# Altium PCB FPv1.3.2.PcbDoc (part 2 of 9)
Units mm, origin at the board's own origin, x right, y up, seen from the top; angles counter-clockwise.
Board outline 81.28 x 53.34 mm, 4 copper layers (Top Layer, GROUND PLANE, POWER PLANE, Bottom Layer); 98 components, 183 nets, 614 pads, 312 vias.
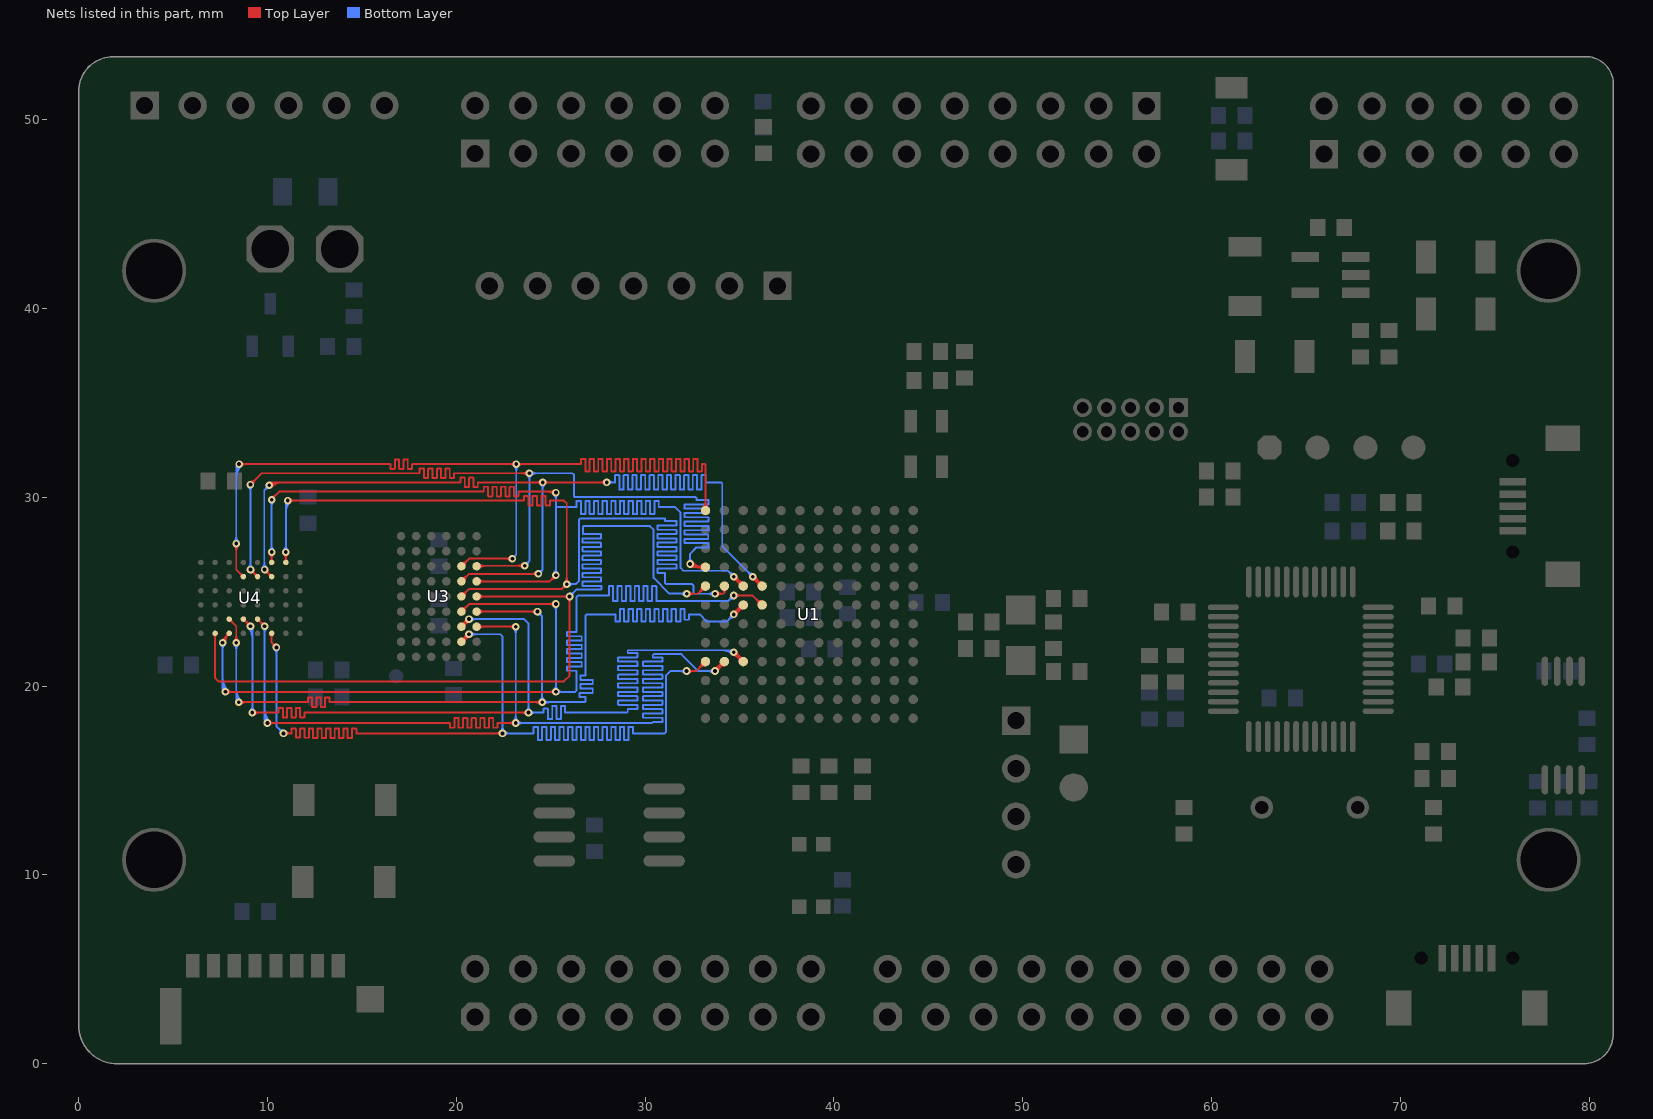
[diagram p4: the nets of this part, all layers, seen from the top]

## Via types
v1: diameter 0.403, hole 0.2, Top Layer to Bottom Layer, tented both sides, 261 vias
v2: diameter 0.503, hole 0.3, Top Layer to Bottom Layer, tented both sides, 25 vias
v3: diameter 0.6, hole 0.4, Top Layer to Bottom Layer, tented both sides, 11 vias
v4: diameter 0.508, hole 0.33, Top Layer to Bottom Layer, tented both sides, 5 vias
v5: diameter 0.703, hole 0.4, Top Layer to Bottom Layer, tented both sides, 3 vias
v6: diameter 0.603, hole 0.4, Top Layer to Bottom Layer, tented both sides, 2 vias
v7: diameter 0.503, hole 0.25, Top Layer to Bottom Layer, tented both sides, 2 vias
v8: diameter 0.6, hole 0.24, Top Layer to Bottom Layer, tented both sides, 1 vias
v9: diameter 0.508, hole 0.349, Top Layer to Bottom Layer, tented both sides, 1 vias
v10: diameter 0.603, hole 0.3, Top Layer to Bottom Layer, tented both sides, 1 vias

## Nets (pads, with @x,y where several pads share a name; then routed paths per layer and width w, separated by ;. In a path a pad name is that pad's centre, name@x,y a point inside that pad or via, vN(x,y) a via of type N, cw(c..) or ccw(c..) an arc to the next point about the centre after c; other vN are vias at no path point) (continued)
AD2: U1.A4 U3.H5 U4.C6 | length 70.7
  Top Layer w0.102: U4.C6@10.158,22.733 cw(c9.998,22.573) 10.225,22.573 cw(c10.452,22.573) U4.C6@10.292,22.733 ; U4.C6@10.225,22.8 10.225,22.3 ; v1@10.324,22.054 ccw(c9.986,22.061) 10.225,22.3 ; v1@10.471,22.201 cw(c10.464,22.539) 10.225,22.3 ; v1(10.475,22.05) 10.225,22.3 ; v1(10.85,17.5) 11.255,17.5 ccw(c11.255,17.523) 11.278,17.523 11.278,17.731 cw(c11.301,17.731) 11.301,17.754 11.484,17.754 cw(c11.484,17.731) 11.507,17.731 11.507,17.31 ccw(c11.53,17.31) 11.53,17.287 11.712,17.287 ccw(c11.712,17.31) 11.735,17.31 11.735,17.731 cw(c11.758,17.731) 11.758,17.754 11.941,17.754 cw(c11.941,17.731) 11.964,17.731 11.964,17.29 ccw(c11.987,17.29) 11.987,17.267 12.17,17.267 ccw(c12.17,17.29) 12.193,17.29 12.193,17.731 cw(c12.215,17.731) 12.215,17.754 12.398,17.754 cw(c12.398,17.731) 12.421,17.731 12.421,17.269 ccw(c12.444,17.269) 12.444,17.246 12.627,17.246 ccw(c12.627,17.269) 12.65,17.269 12.65,17.731 cw(c12.673,17.731) 12.673,17.754 12.855,17.754 cw(c12.855,17.731) 12.878,17.731 12.878,17.269 ccw(c12.901,17.269) 12.901,17.246 13.084,17.246 ccw(c13.084,17.269) 13.107,17.269 13.107,17.731 cw(c13.13,17.731) 13.13,17.754 13.313,17.754 cw(c13.313,17.731) 13.336,17.731 13.336,17.269 ccw(c13.358,17.269) 13.358,17.246 13.541,17.246 ccw(c13.541,17.269) 13.564,17.269 13.564,17.731 cw(c13.587,17.731) 13.587,17.754 13.77,17.754 cw(c13.77,17.731) 13.793,17.731 13.793,17.269 ccw(c13.816,17.269) 13.816,17.246 13.998,17.246 ccw(c13.998,17.269) 14.021,17.269 14.021,17.731 cw(c14.044,17.731) 14.044,17.754 14.227,17.754 cw(c14.227,17.731) 14.25,17.731 14.25,17.269 ccw(c14.273,17.269) 14.273,17.246 14.456,17.246 ccw(c14.456,17.269) 14.479,17.269 14.479,17.731 cw(c14.501,17.731) 14.501,17.754 14.684,17.754 cw(c14.684,17.731) 14.707,17.731 14.707,17.523 ccw(c14.73,17.523) 14.73,17.5 v1(22.45,17.5) ; v1@10.957,17.393 cw(c11.214,17.136) 11.214,17.5 cw(c11.214,17.864) v1@10.957,17.607 ; U3.H5@20.275,22.35 v1(20.675,22.75) ; U3.H5@20.275,22.524 ccw(c20.275,22.945) 20.572,22.647 ccw(c20.87,22.35) U3.H5@20.449,22.35 ; U3.H5@20.365,22.528 ccw(c20.202,22.81) v1@20.525,22.769 ; U3.H5@20.453,22.44 cw(c20.735,22.277) v1@20.694,22.6 ; 20.457,22.581 cw(c20.575,22.377) v1@20.636,22.604 ; 20.506,22.532 ccw(c20.302,22.65) v1@20.529,22.711 ; v1@20.524,22.75 cw(c20.16,22.75) 20.418,22.493 cw(c20.675,22.235) v1@20.675,22.599 ; v1@22.343,17.393 ccw(c22.086,17.136) 22.086,17.5 ccw(c22.086,17.864) v1@22.343,17.607 ; v1(32.2,20.8) 32.7,20.8 U1.A4@33.2,21.3 ; v1@32.307,20.693 cw(c32.564,20.436) 32.564,20.8 cw(c32.564,21.164) v1@32.307,20.907 ; U1.A4@33.001,21.3 cw(c32.52,21.3) 32.86,20.96 cw(c33.2,20.62) U1.A4@33.2,21.101
  Bottom Layer w0.102: v1@10.368,21.944 cw(c10.111,21.686) 10.475,21.686 cw(c10.839,21.686) v1@10.581,21.944 ; v1(10.475,22.05) 10.475,17.875 v1(10.85,17.5) ; v1@10.699,17.5 ccw(c10.335,17.5) 10.593,17.757 ccw(c10.85,18.015) v1@10.85,17.651 ; v1(20.675,22.75) 22.325,22.75 22.45,22.625 v1(22.45,17.5) 24.092,17.5 24.092,17.835 cw(c24.103,17.835) 24.103,17.847 24.309,17.847 cw(c24.309,17.835) 24.32,17.835 24.32,17.165 ccw(c24.332,17.165) 24.332,17.153 24.538,17.153 ccw(c24.538,17.165) 24.549,17.165 24.549,17.835 cw(c24.561,17.835) 24.561,17.847 24.766,17.847 cw(c24.766,17.835) 24.778,17.835 24.778,17.165 ccw(c24.789,17.165) 24.789,17.153 24.995,17.153 ccw(c24.995,17.165) 25.006,17.165 25.006,17.835 cw(c25.018,17.835) 25.018,17.847 25.223,17.847 cw(c25.223,17.835) 25.235,17.835 25.235,17.165 ccw(c25.246,17.165) 25.246,17.153 25.452,17.153 ccw(c25.452,17.165) 25.463,17.165 25.463,17.835 cw(c25.475,17.835) 25.475,17.847 25.681,17.847 cw(c25.681,17.835) 25.692,17.835 25.692,17.165 ccw(c25.704,17.165) 25.704,17.153 25.909,17.153 ccw(c25.909,17.165) 25.921,17.165 25.921,17.835 cw(c25.932,17.835) 25.932,17.847 26.138,17.847 cw(c26.138,17.835) 26.149,17.835 26.149,17.165 ccw(c26.161,17.165) 26.161,17.153 26.366,17.153 ccw(c26.366,17.165) 26.378,17.165 26.378,17.835 cw(c26.389,17.835) 26.389,17.847 26.595,17.847 cw(c26.595,17.835) 26.607,17.835 26.607,17.165 ccw(c26.618,17.165) 26.618,17.153 26.824,17.153 ccw(c26.824,17.165) 26.835,17.165 26.835,17.835 cw(c26.847,17.835) 26.847,17.847 27.052,17.847 cw(c27.052,17.835) 27.064,17.835 27.064,17.165 ccw(c27.075,17.165) 27.075,17.153 27.281,17.153 ccw(c27.281,17.165) 27.292,17.165 27.292,17.835 cw(c27.304,17.835) 27.304,17.847 27.509,17.847 cw(c27.509,17.835) 27.521,17.835 27.521,17.165 ccw(c27.532,17.165) 27.532,17.153 27.738,17.153 ccw(c27.738,17.165) 27.749,17.165 27.749,17.835 cw(c27.761,17.835) 27.761,17.847 27.967,17.847 cw(c27.967,17.835) 27.978,17.835 27.978,17.165 ccw(c27.99,17.165) 27.99,17.153 28.195,17.153 ccw(c28.195,17.165) 28.207,17.165 28.207,17.835 cw(c28.218,17.835) 28.218,17.847 28.424,17.847 cw(c28.424,17.835) 28.435,17.835 28.435,17.165 ccw(c28.447,17.165) 28.447,17.153 28.652,17.153 ccw(c28.652,17.165) 28.664,17.165 28.664,17.835 cw(c28.675,17.835) 28.675,17.847 28.881,17.847 cw(c28.881,17.835) 28.892,17.835 28.892,17.165 ccw(c28.904,17.165) 28.904,17.153 29.11,17.153 ccw(c29.11,17.165) 29.121,17.165 29.121,17.835 cw(c29.133,17.835) 29.133,17.847 29.338,17.847 cw(c29.338,17.835) 29.35,17.835 29.35,17.5 31.039,17.5 31.115,17.576 31.115,20.574 31.341,20.8 v1(32.2,20.8) ; v1@20.782,22.643 cw(c21.039,22.386) 21.039,22.75 cw(c21.039,23.114) v1@20.782,22.857 ; v1@22.343,17.607 ccw(c22.086,17.864) 22.45,17.864 ccw(c22.814,17.864) 22.557,17.607 ccw(c22.814,17.864) 22.814,17.5 ccw(c22.814,17.136) v1@22.557,17.393 ; v1@32.093,20.693 ccw(c31.836,20.436) 31.836,20.8 ccw(c31.836,21.164) v1@32.093,20.907
AD3: U1.B4 U3.G6 U4.D5 | length 72.9
  Top Layer w0.102: U4.D5@9.475,23.456 cw(c9.475,23.228) 9.636,23.389 cw(c9.797,23.55) U4.D5@9.569,23.55 ; U4.D5@9.475,23.55 v1(9.85,23.175) ; v1@9.699,23.175 ccw(c9.335,23.175) 9.593,23.432 ccw(c9.85,23.69) v1@9.85,23.326 ; v1(10,18.05) 19.65,18.05 cw(c19.65,18.029) 19.671,18.029 19.671,17.819 ccw(c19.694,17.819) 19.694,17.796 19.877,17.796 ccw(c19.877,17.819) 19.9,17.819 19.9,18.281 cw(c19.923,18.281) 19.923,18.304 20.105,18.304 cw(c20.105,18.281) 20.128,18.281 20.128,17.819 ccw(c20.151,17.819) 20.151,17.796 20.334,17.796 ccw(c20.334,17.819) 20.357,17.819 20.357,18.281 cw(c20.38,18.281) 20.38,18.304 20.563,18.304 cw(c20.563,18.281) 20.586,18.281 20.586,17.819 ccw(c20.608,17.819) 20.608,17.796 20.791,17.796 ccw(c20.791,17.819) 20.814,17.819 20.814,18.281 cw(c20.837,18.281) 20.837,18.304 21.02,18.304 cw(c21.02,18.281) 21.043,18.281 21.043,17.819 ccw(c21.066,17.819) 21.066,17.796 21.248,17.796 ccw(c21.248,17.819) 21.271,17.819 21.271,18.281 cw(c21.294,18.281) 21.294,18.304 21.477,18.304 cw(c21.477,18.281) 21.5,18.281 21.5,17.819 ccw(c21.523,17.819) 21.523,17.796 21.706,17.796 ccw(c21.706,17.819) 21.729,17.819 21.729,18.281 cw(c21.751,18.281) 21.751,18.304 21.934,18.304 cw(c21.934,18.281) 21.957,18.281 21.957,17.819 ccw(c21.98,17.819) 21.98,17.796 22.163,17.796 ccw(c22.163,17.819) 22.186,17.819 22.186,18.027 cw(c22.209,18.027) 22.209,18.05 v1(23.15,18.05) ; v1@10.107,17.943 cw(c10.364,17.686) 10.364,18.05 cw(c10.364,18.414) v1@10.107,18.157 ; U3.G6@21.075,23.15 v1(23.15,23.15) ; U3.G6@21.198,23.027 cw(c21.496,22.729) 21.496,23.15 cw(c21.496,23.571) U3.G6@21.198,23.273 ; v1@23.043,17.943 ccw(c22.786,17.686) 22.786,18.05 ccw(c22.786,18.414) v1@23.043,18.157 ; v1@23.043,23.043 ccw(c22.786,22.786) 22.786,23.15 ccw(c22.786,23.514) v1@23.043,23.257 ; v1@33.662,20.946 ccw(c33.521,21.482) U1.B4@34.001,21.205 ; v1@33.688,20.847 ccw(c33.608,21.151) 33.88,20.994 ; v1(33.7,20.8) U1.B4@34.2,21.3 ; v1@33.7,20.951 ccw(c33.7,21.315) 33.957,21.057 ccw(c34.215,20.8) v1@33.851,20.8 ; v1@33.747,20.788 cw(c34.051,20.708) 33.894,20.98 ; v1@33.75,20.942 ccw(c33.785,21.042) 33.877,20.989 ; v1@33.842,20.85 cw(c33.942,20.885) 33.889,20.977 ; v1@33.846,20.762 cw(c34.382,20.621) U1.B4@34.105,21.101 ; U1.B4@34.001,21.3 cw(c33.52,21.3) 33.86,20.96 cw(c34.2,20.62) U1.B4@34.2,21.101 ; v1@33.739,20.946 ccw(c33.781,21.104) 33.863,20.962 cw(c33.781,21.104) v1@33.739,20.946 ; v1@33.846,20.839 cw(c34.004,20.881) 33.862,20.963 ccw(c34.004,20.881) v1@33.846,20.839
  Bottom Layer w0.102: v1@9.743,23.068 cw(c9.486,22.811) 9.85,22.811 cw(c10.214,22.811) v1@9.957,23.068 ; 9.85,18.286 ccw(c10.236,18.286) v1@9.963,18.013 ; 9.85,18.531 ccw(c10.481,18.531) v1@10.035,18.085 ; 9.85,18.776 ccw(c10.726,18.776) v1@10.107,18.157 ; v1(9.85,23.175) 9.85,18.2 v1(10,18.05) ; v1@23.043,18.157 ccw(c22.786,18.414) 23.15,18.414 ccw(c23.514,18.414) 23.257,18.157 ccw(c23.514,18.414) 23.514,18.05 ccw(c23.514,17.686) v1@23.257,17.943 ; v1@23.043,23.043 cw(c22.786,22.786) 23.15,22.786 cw(c23.514,22.786) v1@23.257,23.043 ; v1(23.15,23.15) v1(23.15,18.05) 30.369,18.05 30.404,18.085 30.404,18.098 30.9,18.098 ccw(c30.9,18.109) 30.912,18.109 30.912,18.315 ccw(c30.9,18.315) 30.9,18.326 29.907,18.326 cw(c29.907,18.338) 29.896,18.338 29.896,18.543 cw(c29.907,18.543) 29.907,18.555 30.9,18.555 ccw(c30.9,18.566) 30.912,18.566 30.912,18.772 ccw(c30.9,18.772) 30.9,18.783 29.907,18.783 cw(c29.907,18.795) 29.896,18.795 29.896,19 cw(c29.907,19) 29.907,19.012 30.9,19.012 ccw(c30.9,19.023) 30.912,19.023 30.912,19.229 ccw(c30.9,19.229) 30.9,19.241 29.907,19.241 cw(c29.907,19.252) 29.896,19.252 29.896,19.458 cw(c29.907,19.458) 29.907,19.469 30.9,19.469 ccw(c30.9,19.481) 30.912,19.481 30.912,19.686 ccw(c30.9,19.686) 30.9,19.698 29.907,19.698 cw(c29.907,19.709) 29.896,19.709 29.896,19.915 cw(c29.907,19.915) 29.907,19.926 30.9,19.926 ccw(c30.9,19.938) 30.912,19.938 30.912,20.143 ccw(c30.9,20.143) 30.9,20.155 29.907,20.155 cw(c29.907,20.166) 29.896,20.166 29.896,20.372 cw(c29.907,20.372) 29.907,20.383 30.9,20.383 ccw(c30.9,20.395) 30.912,20.395 30.912,20.601 ccw(c30.9,20.601) 30.9,20.612 29.907,20.612 cw(c29.907,20.624) 29.896,20.624 29.896,20.829 cw(c29.907,20.829) 29.907,20.841 30.9,20.841 ccw(c30.9,20.852) 30.912,20.852 30.912,21.058 ccw(c30.9,21.058) 30.9,21.069 29.907,21.069 cw(c29.907,21.081) 29.896,21.081 29.896,21.286 cw(c29.907,21.286) 29.907,21.298 30.9,21.298 ccw(c30.9,21.309) 30.912,21.309 30.912,21.515 ccw(c30.9,21.515) 30.9,21.526 30.404,21.526 30.404,21.641 30.463,21.7 31.919,21.7 32.819,20.8 v1(33.7,20.8) ; v1@33.593,20.693 ccw(c33.336,20.436) 33.336,20.8 ccw(c33.336,21.164) v1@33.593,20.907
AD4: U1.C4 U3.G5 U4.E5 | length 74.2
  Top Layer w0.102: U4.E5@8.725,23.456 cw(c8.725,23.228) 8.886,23.389 cw(c9.047,23.55) U4.E5@8.819,23.55 ; U4.E5@8.725,23.55 v1(9.1,23.175) ; v1@8.949,23.175 ccw(c8.585,23.175) 8.843,23.432 ccw(c9.1,23.69) v1@9.1,23.326 ; v1(9.2,18.6) 10.566,18.6 ccw(c10.566,18.623) 10.589,18.623 10.589,18.831 cw(c10.612,18.831) 10.612,18.854 10.795,18.854 cw(c10.795,18.831) 10.818,18.831 10.818,18.369 ccw(c10.841,18.369) 10.841,18.346 11.024,18.346 ccw(c11.024,18.369) 11.047,18.369 11.047,18.831 cw(c11.069,18.831) 11.069,18.854 11.252,18.854 cw(c11.252,18.831) 11.275,18.831 11.275,18.369 ccw(c11.298,18.369) 11.298,18.346 11.481,18.346 ccw(c11.481,18.369) 11.504,18.369 11.504,18.831 cw(c11.527,18.831) 11.527,18.854 11.709,18.854 cw(c11.709,18.831) 11.732,18.831 11.732,18.369 ccw(c11.755,18.369) 11.755,18.346 11.938,18.346 ccw(c11.938,18.369) 11.961,18.369 11.961,18.6 v1(23.825,18.6) ; v1@9.307,18.493 cw(c9.564,18.236) 9.564,18.6 cw(c9.564,18.964) v1@9.307,18.707 ; U3.G5@20.275,23.15 v1(20.675,23.55) ; U3.G5@20.275,23.324 ccw(c20.275,23.745) v1@20.572,23.447 ; U3.G5@20.365,23.328 ccw(c20.202,23.61) v1@20.525,23.569 ; U3.G5@20.449,23.15 cw(c20.87,23.15) v1@20.572,23.447 ; U3.G5@20.453,23.24 cw(c20.735,23.077) v1@20.694,23.4 ; 20.457,23.381 cw(c20.575,23.177) v1@20.636,23.404 ; 20.506,23.332 ccw(c20.302,23.45) v1@20.529,23.511 ; v1@20.524,23.55 cw(c20.16,23.55) 20.418,23.293 cw(c20.675,23.035) v1@20.675,23.399 ; v1@23.718,18.493 ccw(c23.461,18.236) 23.461,18.6 ccw(c23.461,18.964) v1@23.718,18.707 ; v1@34.662,21.654 cw(c34.521,21.118) U1.C4@35.001,21.395 ; v1@34.688,21.753 cw(c34.608,21.449) 34.88,21.606 ; v1@34.7,21.649 cw(c34.7,21.285) 34.957,21.543 cw(c35.215,21.8) v1@34.851,21.8 ; v1(34.7,21.8) U1.C4@35.2,21.3 ; v1@34.747,21.812 ccw(c35.051,21.892) 34.894,21.62 ; v1@34.75,21.658 cw(c34.785,21.558) 34.877,21.611 ; v1@34.842,21.75 ccw(c34.942,21.715) 34.889,21.623 ; v1@34.846,21.838 ccw(c35.382,21.979) U1.C4@35.105,21.499 ; U1.C4@35.001,21.3 ccw(c34.52,21.3) 34.86,21.64 ccw(c35.2,21.98) U1.C4@35.2,21.499 ; v1@34.739,21.654 cw(c34.781,21.496) 34.863,21.638 ccw(c34.781,21.496) v1@34.739,21.654 ; v1@34.846,21.761 ccw(c35.004,21.719) 34.862,21.637 cw(c35.004,21.719) v1@34.846,21.761
  Bottom Layer w0.102: v1@8.993,23.068 cw(c8.495,22.57) 9.2,22.57 ; v1@9.065,23.14 cw(c8.74,22.815) 9.2,22.815 ; v1@9.093,18.707 ccw(c8.836,18.964) 9.2,18.964 ccw(c9.564,18.964) v1@9.307,18.707 ; v1(9.1,23.175) 9.2,23.075 v1(9.2,18.6) ; v1(20.675,23.55) 23.6,23.55 23.825,23.325 v1(23.825,18.6) 24.625,18.6 24.625,18.795 cw(c24.637,18.795) 24.637,18.806 24.842,18.806 cw(c24.842,18.795) 24.854,18.795 24.854,18.265 ccw(c24.865,18.265) 24.865,18.253 25.071,18.253 ccw(c25.071,18.265) 25.082,18.265 25.082,18.935 cw(c25.094,18.935) 25.094,18.947 25.3,18.947 cw(c25.3,18.935) 25.311,18.935 25.311,18.265 ccw(c25.323,18.265) 25.323,18.253 25.528,18.253 ccw(c25.528,18.265) 25.54,18.265 25.54,18.935 cw(c25.551,18.935) 25.551,18.947 25.757,18.947 cw(c25.757,18.935) 25.768,18.935 25.768,18.6 29.039,18.6 29.083,18.644 29.083,18.783 29.58,18.783 ccw(c29.58,18.795) 29.591,18.795 29.591,19 ccw(c29.58,19) 29.58,19.012 28.586,19.012 cw(c28.586,19.023) 28.575,19.023 28.575,19.229 cw(c28.586,19.229) 28.586,19.241 29.58,19.241 ccw(c29.58,19.252) 29.591,19.252 29.591,19.458 ccw(c29.58,19.458) 29.58,19.469 28.586,19.469 cw(c28.586,19.481) 28.575,19.481 28.575,19.686 cw(c28.586,19.686) 28.586,19.698 29.58,19.698 ccw(c29.58,19.709) 29.591,19.709 29.591,19.915 ccw(c29.58,19.915) 29.58,19.926 28.586,19.926 cw(c28.586,19.938) 28.575,19.938 28.575,20.143 cw(c28.586,20.143) 28.586,20.155 29.58,20.155 ccw(c29.58,20.166) 29.591,20.166 29.591,20.372 ccw(c29.58,20.372) 29.58,20.383 28.586,20.383 cw(c28.586,20.395) 28.575,20.395 28.575,20.601 cw(c28.586,20.601) 28.586,20.612 29.58,20.612 ccw(c29.58,20.624) 29.591,20.624 29.591,20.829 ccw(c29.58,20.829) 29.58,20.841 28.586,20.841 cw(c28.586,20.852) 28.575,20.852 28.575,21.058 cw(c28.586,21.058) 28.586,21.069 29.58,21.069 ccw(c29.58,21.081) 29.591,21.081 29.591,21.286 ccw(c29.58,21.286) 29.58,21.298 28.586,21.298 cw(c28.586,21.309) 28.575,21.309 28.575,21.515 cw(c28.586,21.515) 28.586,21.526 29.58,21.526 ccw(c29.58,21.538) 29.591,21.538 29.591,21.744 ccw(c29.58,21.744) 29.58,21.755 29.083,21.755 29.083,21.869 29.117,21.903 34.597,21.903 v1(34.7,21.8) ; v1@20.782,23.443 cw(c21.039,23.186) 21.039,23.55 cw(c21.039,23.914) v1@20.782,23.657 ; v1@23.718,18.707 ccw(c23.461,18.964) 23.825,18.964 ccw(c24.189,18.964) 23.932,18.707 ccw(c24.189,18.964) 24.189,18.6 ; v1@23.932,18.493 cw(c24.189,18.236) 24.189,18.6 ; 34.087,21.903 cw(c34.087,21.187) v1@34.593,21.693 ; 34.332,21.903 cw(c34.332,21.432) v1@34.665,21.765
AD5: U1.C7 U3.F6 U4.F5 | length 72.5
  Top Layer w0.102: U4.F5@7.975,23.456 cw(c7.975,23.228) 8.136,23.389 cw(c8.297,23.55) U4.F5@8.069,23.55 ; U4.F5@7.975,23.55 8.35,23.175 v1(8.35,22.3) ; v1@8.243,22.407 ccw(c7.986,22.664) 8.35,22.664 ccw(c8.714,22.664) v1@8.457,22.407 ; v1(8.475,19.15) 12.116,19.15 ccw(c12.116,19.173) 12.139,19.173 12.139,19.381 cw(c12.162,19.381) 12.162,19.404 12.345,19.404 cw(c12.345,19.381) 12.368,19.381 12.368,18.919 ccw(c12.391,18.919) 12.391,18.896 12.574,18.896 ccw(c12.574,18.919) 12.597,18.919 12.597,19.381 cw(c12.619,19.381) 12.619,19.404 12.802,19.404 cw(c12.802,19.381) 12.825,19.381 12.825,18.919 ccw(c12.848,18.919) 12.848,18.896 13.031,18.896 ccw(c13.031,18.919) 13.054,18.919 13.054,19.381 cw(c13.077,19.381) 13.077,19.404 13.259,19.404 cw(c13.259,19.381) 13.282,19.381 13.282,19.173 ccw(c13.305,19.173) 13.305,19.15 v1(24.55,19.15) ; v1@8.582,19.043 cw(c8.839,18.786) 8.839,19.15 cw(c8.839,19.514) v1@8.582,19.257 ; U3.F6@21.075,23.95 v1(24.3,23.95) ; U3.F6@21.198,23.827 cw(c21.496,23.529) 21.496,23.95 cw(c21.496,24.371) U3.F6@21.198,24.073 ; v1@24.193,23.843 ccw(c23.936,23.586) 23.936,23.95 ccw(c23.936,24.314) v1@24.193,24.057 ; v1@24.443,19.043 ccw(c24.186,18.786) 24.186,19.15 ccw(c24.186,19.514) v1@24.443,19.257 ; v1@34.662,23.946 ccw(c34.521,24.482) U1.C7@35.001,24.205 ; v1@34.688,23.847 ccw(c34.608,24.151) 34.88,23.994 ; v1(34.7,23.8) U1.C7@35.2,24.3 ; v1@34.7,23.951 ccw(c34.7,24.315) 34.957,24.057 ccw(c35.215,23.8) v1@34.851,23.8 ; v1@34.747,23.788 cw(c35.051,23.708) 34.894,23.98 ; v1@34.75,23.942 ccw(c34.785,24.042) 34.877,23.989 ; v1@34.842,23.85 cw(c34.942,23.885) 34.889,23.977 ; v1@34.846,23.762 cw(c35.382,23.621) U1.C7@35.105,24.101 ; U1.C7@35.001,24.3 cw(c34.52,24.3) 34.86,23.96 cw(c35.2,23.62) U1.C7@35.2,24.101 ; v1@34.739,23.946 ccw(c34.781,24.104) 34.863,23.962 cw(c34.781,24.104) v1@34.739,23.946 ; v1@34.846,23.839 cw(c35.004,23.881) 34.862,23.963 ccw(c35.004,23.881) v1@34.846,23.839
  Bottom Layer w0.102: v1@8.243,22.193 cw(c7.986,21.936) 8.35,21.936 cw(c8.714,21.936) v1@8.457,22.193 ; 8.35,19.325 ccw(c8.65,19.325) v1@8.438,19.113 ; 8.35,19.571 ccw(c8.896,19.571) v1@8.51,19.185 ; 8.35,19.816 ccw(c9.141,19.816) v1@8.582,19.257 ; v1(8.35,22.3) 8.35,19.275 v1(8.475,19.15) ; v1(24.3,23.95) 24.55,23.7 ; v1@24.303,23.799 cw(c24.31,23.46) 24.55,23.7 ; v1@24.443,19.257 ccw(c24.186,19.514) 24.55,19.514 ccw(c24.914,19.514) 24.657,19.257 ccw(c24.914,19.514) 24.914,19.15 ccw(c24.914,18.786) v1@24.657,19.043 ; v1@24.451,23.947 ccw(c24.79,23.94) 24.55,23.7 ; v1@34.549,23.8 cw(c34.185,23.8) 34.443,23.543 cw(c34.7,23.285) v1@34.7,23.649 ; v1(34.7,23.8) 34.319,23.419 33.274,23.419 32.893,23.8 32.322,23.8 32.322,23.519 32.093,23.519 32.093,24.097 31.864,24.097 31.864,23.419 31.636,23.419 31.636,24.097 31.407,24.097 31.407,23.419 31.178,23.419 31.178,24.097 30.95,24.097 30.95,23.419 30.721,23.419 30.721,24.097 30.493,24.097 30.493,23.419 30.264,23.419 30.264,24.097 30.035,24.097 30.035,23.419 29.807,23.419 29.807,24.097 29.578,24.097 29.578,23.419 29.35,23.419 29.35,24.097 29.121,24.097 29.121,23.419 28.892,23.419 28.892,24.097 28.664,24.097 28.664,23.419 28.435,23.419 28.435,23.8 26.899,23.8 26.848,23.749 26.848,20.561 26.59,20.561 ccw(c26.59,20.55) 26.578,20.55 26.578,20.344 ccw(c26.59,20.344) 26.59,20.333 27.217,20.333 cw(c27.217,20.321) 27.229,20.321 27.229,20.116 cw(c27.217,20.116) 27.217,20.104 26.59,20.104 ccw(c26.59,20.093) 26.578,20.093 26.578,19.887 ccw(c26.59,19.887) 26.59,19.875 27.217,19.875 cw(c27.217,19.864) 27.229,19.864 27.229,19.658 cw(c27.217,19.658) 27.217,19.647 26.538,19.647 ccw(c26.538,19.635) 26.527,19.635 26.527,19.43 ccw(c26.538,19.43) 26.538,19.418 26.848,19.418 26.848,19.202 26.795,19.15 v1(24.55,19.15) 24.55,23.7
AD6: U1.D7 U3.F5 U4.F6 | length 72.5
  Top Layer w0.102: v1(7.625,22.3) 7.625,22.45 U4.F6@7.975,22.8 ccw(c8.456,22.319) v1@7.776,22.303 ; v1@7.674,22.301 cw(c8.128,22.311) 7.807,22.632 ; v1(7.775,19.7) v1(25.275,19.7) ; U4.F6@7.881,22.8 cw(c7.653,22.8) 7.814,22.639 cw(c7.975,22.478) U4.F6@7.975,22.706 ; v1@7.882,19.593 cw(c8.139,19.336) 8.139,19.7 cw(c8.139,20.064) v1@7.882,19.807 ; U3.F5@20.275,23.95 20.675,24.35 v1(25.275,24.35) ; U3.F5@20.275,24.124 ccw(c20.275,24.545) 20.572,24.247 ccw(c20.87,23.95) U3.F5@20.449,23.95 ; v1@25.168,19.593 ccw(c24.911,19.336) 24.911,19.7 ccw(c24.911,20.064) v1@25.168,19.807 ; v1@25.168,24.243 ccw(c24.911,23.986) 24.911,24.35 ccw(c24.911,24.714) v1@25.168,24.457 ; v1(34.7,24.8) 35.7,24.8 U1.D7@36.2,24.3 ; v1@34.807,24.693 cw(c35.064,24.436) 35.064,24.8 cw(c35.064,25.164) v1@34.807,24.907 ; U1.D7@36.001,24.3 ccw(c35.52,24.3) 35.86,24.64 ccw(c36.2,24.98) U1.D7@36.2,24.499
  Bottom Layer w0.102: v1@7.518,22.193 cw(c7.261,21.936) 7.625,21.936 cw(c7.989,21.936) v1@7.732,22.193 ; 7.625,19.936 ccw(c8.011,19.936) v1@7.738,19.663 ; 7.625,20.181 ccw(c8.256,20.181) v1@7.81,19.735 ; 7.625,20.426 ccw(c8.501,20.426) v1@7.882,19.807 ; v1(7.625,22.3) 7.625,19.85 v1(7.775,19.7) ; v1@25.168,19.807 ccw(c24.911,20.064) 25.275,20.064 ccw(c25.639,20.064) 25.382,19.807 ccw(c25.639,20.064) 25.639,19.7 ccw(c25.639,19.336) v1@25.382,19.593 ; v1@25.168,24.243 cw(c24.911,23.986) 25.275,23.986 cw(c25.639,23.986) v1@25.382,24.243 ; v1(25.275,24.35) v1(25.275,19.7) 26.3,19.7 26.375,19.775 26.375,20.815 25.878,20.815 cw(c25.878,20.827) 25.867,20.827 25.867,21.032 cw(c25.878,21.032) 25.878,21.044 26.633,21.044 ccw(c26.633,21.055) 26.645,21.055 26.645,21.261 ccw(c26.633,21.261) 26.633,21.273 25.878,21.273 cw(c25.878,21.284) 25.867,21.284 25.867,21.49 cw(c25.878,21.49) 25.878,21.501 26.633,21.501 ccw(c26.633,21.513) 26.645,21.513 26.645,21.718 ccw(c26.633,21.718) 26.633,21.73 25.878,21.73 cw(c25.878,21.741) 25.867,21.741 25.867,21.947 cw(c25.878,21.947) 25.878,21.958 26.633,21.958 ccw(c26.633,21.97) 26.645,21.97 26.645,22.175 ccw(c26.633,22.175) 26.633,22.187 25.878,22.187 cw(c25.878,22.198) 25.867,22.198 25.867,22.404 cw(c25.878,22.404) 25.878,22.415 26.633,22.415 ccw(c26.633,22.427) 26.645,22.427 26.645,22.633 ccw(c26.633,22.633) 26.633,22.644 25.878,22.644 cw(c25.878,22.656) 25.867,22.656 25.867,22.861 cw(c25.878,22.861) 25.878,22.873 26.375,22.873 26.375,24.724 26.441,24.79 28.08,24.79 28.08,25.287 cw(c28.091,25.287) 28.091,25.298 28.297,25.298 cw(c28.297,25.287) 28.308,25.287 28.308,24.515 ccw(c28.32,24.515) 28.32,24.503 28.525,24.503 ccw(c28.525,24.515) 28.537,24.515 28.537,25.287 cw(c28.548,25.287) 28.548,25.298 28.754,25.298 cw(c28.754,25.287) 28.765,25.287 28.765,24.515 ccw(c28.777,24.515) 28.777,24.503 28.983,24.503 ccw(c28.983,24.515) 28.994,24.515 28.994,25.287 cw(c29.006,25.287) 29.006,25.298 29.211,25.298 cw(c29.211,25.287) 29.223,25.287 29.223,24.515 ccw(c29.234,24.515) 29.234,24.503 29.44,24.503 ccw(c29.44,24.515) 29.451,24.515 29.451,25.287 cw(c29.463,25.287) 29.463,25.298 29.668,25.298 cw(c29.668,25.287) 29.68,25.287 29.68,24.515 ccw(c29.691,24.515) 29.691,24.503 29.897,24.503 ccw(c29.897,24.515) 29.909,24.515 29.909,25.287 cw(c29.92,25.287) 29.92,25.298 30.126,25.298 cw(c30.126,25.287) 30.137,25.287 30.137,24.515 ccw(c30.149,24.515) 30.149,24.503 30.354,24.503 ccw(c30.354,24.515) 30.366,24.515 30.366,25.287 cw(c30.377,25.287) 30.377,25.298 30.583,25.298 cw(c30.583,25.287) 30.594,25.287 30.594,24.515 ; 30.606,24.503 cw(c30.606,24.515) 30.594,24.515 ; v1@34.549,24.8 cw(c34.185,24.8) 34.443,24.543 cw(c34.7,24.285) v1@34.7,24.649 ; v1(34.7,24.8) 34.415,24.515 30.594,24.515
AD7: U1.A8 U3.E6 U4.G6 | length 62.3
  Top Layer w0.102: U4.G6@7.158,22.733 cw(c6.998,22.573) 7.225,22.573 cw(c7.452,22.573) U4.G6@7.292,22.733 ; U4.G6@7.225,22.8 7.225,20.425 7.4,20.25 25.7,20.25 26,20.55 v1(26,24.75) U3.E6@21.075,24.75 ; U3.E6@21.198,24.627 cw(c21.496,24.329) 21.496,24.75 cw(c21.496,25.171) U3.E6@21.198,24.873 ; v1@25.893,24.857 cw(c25.636,25.114) 25.636,24.75 cw(c25.636,24.386) 25.893,24.643 cw(c25.636,24.386) 26,24.386 cw(c26.364,24.386) v1@26.107,24.643 ; v1(32.207,24.892) 32.792,24.892 U1.A8@33.2,25.3 ; v1@32.314,24.785 cw(c32.571,24.528) 32.571,24.892 cw(c32.571,25.256) v1@32.314,24.999 ; U1.A8@33.001,25.3 cw(c32.52,25.3) 32.86,24.96 cw(c33.2,24.62) U1.A8@33.2,25.101
  Bottom Layer w0.102: v1(26,24.75) 26.371,25.121 27.661,25.121 27.686,25.146 27.686,25.298 27.673,25.311 26.703,25.311 cw(c26.703,25.323) 26.692,25.323 26.692,25.528 cw(c26.703,25.528) 26.703,25.54 27.649,25.54 ccw(c27.649,25.551) 27.661,25.551 27.661,25.757 ccw(c27.649,25.757) 27.649,25.768 26.707,25.768 cw(c26.707,25.78) 26.695,25.78 26.695,25.985 cw(c26.707,25.985) 26.707,25.997 27.649,25.997 ccw(c27.649,26.008) 27.661,26.008 27.661,26.214 ccw(c27.649,26.214) 27.649,26.226 26.707,26.226 cw(c26.707,26.237) 26.695,26.237 26.695,26.443 cw(c26.707,26.443) 26.707,26.454 27.649,26.454 ccw(c27.649,26.466) 27.661,26.466 27.661,26.671 ccw(c27.649,26.671) 27.649,26.683 26.707,26.683 cw(c26.707,26.694) 26.695,26.694 26.695,26.9 cw(c26.707,26.9) 26.707,26.911 27.649,26.911 ccw(c27.649,26.923) 27.661,26.923 27.661,27.128 ccw(c27.649,27.128) 27.649,27.14 26.707,27.14 cw(c26.707,27.151) 26.695,27.151 26.695,27.357 cw(c26.707,27.357) 26.707,27.368 27.649,27.368 ccw(c27.649,27.38) 27.661,27.38 27.661,27.586 ccw(c27.649,27.586) 27.649,27.597 26.707,27.597 cw(c26.707,27.609) 26.695,27.609 26.695,27.814 cw(c26.707,27.814) 26.707,27.826 27.649,27.826 ccw(c27.649,27.837) 27.661,27.837 27.661,28.043 ccw(c27.649,28.043) 27.649,28.054 26.733,28.054 26.721,28.067 26.721,28.448 26.746,28.473 30.251,28.473 30.455,28.27 30.455,25.73 31.286,24.899 32.2,24.899 v1(32.207,24.892) ; v1@26,24.901 ccw(c26,25.265) 26.257,25.007 ccw(c26.515,24.75) v1@26.151,24.75 ; 31.826,24.899 cw(c31.826,24.511) v1@32.101,24.785 ; 31.861,24.899 ccw(c31.861,25.238) v1@32.101,24.999
AD8: U1.B8 U3.E5 U4.B1 | length 66.2
  Top Layer w0.102: v1@10.868,26.993 cw(c10.611,26.736) 10.975,26.736 cw(c11.339,26.736) v1@11.082,26.993 ; U4.B1@10.908,26.617 ccw(c10.748,26.777) 10.975,26.777 ccw(c11.202,26.777) U4.B1@11.042,26.617 ; U4.B1@10.975,26.55 v1(10.975,27.1) ; v1(11.075,29.825) 23.566,29.825 ccw(c23.566,29.848) 23.589,29.848 23.589,30.056 cw(c23.612,30.056) 23.612,30.079 23.795,30.079 cw(c23.795,30.056) 23.818,30.056 23.818,29.594 ccw(c23.841,29.594) 23.841,29.571 24.023,29.571 ccw(c24.023,29.594) 24.046,29.594 24.046,30.056 cw(c24.069,30.056) 24.069,30.079 24.252,30.079 cw(c24.252,30.056) 24.275,30.056 24.275,29.594 ccw(c24.298,29.594) 24.298,29.571 24.481,29.571 ccw(c24.481,29.594) 24.504,29.594 24.504,30.056 cw(c24.526,30.056) 24.526,30.079 24.709,30.079 cw(c24.709,30.056) 24.732,30.056 24.732,29.594 ccw(c24.755,29.594) 24.755,29.571 24.938,29.571 ccw(c24.938,29.594) 24.961,29.594 24.961,29.802 cw(c24.984,29.802) 24.984,29.825 25.7,29.825 25.85,29.675 v1(25.85,25.4) 25.6,25.15 ; v1@11.182,29.718 cw(c11.439,29.461) 11.439,29.825 cw(c11.439,30.189) v1@11.182,29.932 ; U3.E5@20.275,24.75 20.675,25.15 25.6,25.15 ; U3.E5@20.275,24.924 ccw(c20.275,25.345) 20.572,25.047 ccw(c20.87,24.75) U3.E5@20.449,24.75 ; v1@25.699,25.397 cw(c25.36,25.39) 25.6,25.15 ; v1@25.743,25.507 ccw(c25.486,25.764) 25.85,25.764 ccw(c26.214,25.764) v1@25.957,25.507 ; v1@25.847,25.249 ccw(c25.84,24.91) 25.6,25.15 ; v1(33.706,24.892) 34.138,24.892 34.2,24.954 ; v1@33.812,24.785 cw(c34.07,24.528) 34.07,24.892 cw(c34.07,25.256) v1@33.812,24.999 ; U1.B8@34.1,25.128 cw(c34,24.954) 34.2,24.954 ; U1.B8@34.2,25.3 34.2,24.954 ; U1.B8@34.3,25.128 ccw(c34.4,24.954) 34.2,24.954
  Bottom Layer w0.102: v1@10.868,27.207 ccw(c10.611,27.464) 10.975,27.464 ccw(c11.339,27.464) v1@11.082,27.207 ; v1(10.975,27.1) 10.975,29.725 v1(11.075,29.825) ; 10.975,29.22 cw(c11.68,29.22) v1@11.182,29.718 ; 10.975,29.465 cw(c11.435,29.465) v1@11.11,29.79 ; v1(25.85,25.4) 26.325,25.4 26.492,25.567 26.492,28.804 26.577,28.888 31.03,28.888 31.064,28.854 31.064,28.74 31.674,28.74 31.674,28.511 30.657,28.511 30.657,28.283 31.674,28.283 31.674,28.054 30.658,28.054 30.658,27.826 31.674,27.826 31.674,27.597 30.658,27.597 30.658,27.368 31.674,27.368 31.674,27.14 30.658,27.14 30.658,26.911 31.674,26.911 31.674,26.683 30.658,26.683 30.658,26.454 31.674,26.454 31.674,26.226 30.658,26.226 30.658,25.997 31.064,25.997 31.064,25.451 31.115,25.4 32.487,25.4 32.561,25.325 32.561,24.944 32.614,24.892 32.794,24.892 ; v1@25.957,25.293 cw(c26.214,25.036) 26.214,25.4 cw(c26.214,25.764) v1@25.957,25.507 ; 32.792,24.894 32.794,24.892 ; v1@33.599,24.785 ccw(c33.342,24.528) 33.342,24.892 ccw(c33.342,25.256) v1@33.599,24.999 ; v1(33.706,24.892) 32.794,24.892
AD9: U1.C8 U3.D6 U4.C1 | length 67.6
  Top Layer w0.102: v1@10.118,26.993 cw(c9.861,26.736) 10.225,26.736 cw(c10.589,26.736) v1@10.332,26.993 ; U4.C1@10.158,26.617 ccw(c9.998,26.777) 10.225,26.777 ccw(c10.452,26.777) U4.C1@10.292,26.617 ; v1@10.176,30.018 ccw(c10.176,30.382) 10.433,30.124 ; U4.C1@10.225,26.55 v1(10.225,27.1) ; v1(10.225,29.875) 10.225,29.916 10.617,30.308 21.434,30.308 ccw(c21.434,30.331) 21.457,30.331 21.457,30.539 cw(c21.48,30.539) 21.48,30.562 21.663,30.562 cw(c21.663,30.539) 21.686,30.539 21.686,30.077 ccw(c21.708,30.077) 21.708,30.054 21.891,30.054 ccw(c21.891,30.077) 21.914,30.077 21.914,30.539 cw(c21.937,30.539) 21.937,30.562 22.12,30.562 cw(c22.12,30.539) 22.143,30.539 22.143,30.077 ccw(c22.166,30.077) 22.166,30.054 22.348,30.054 ccw(c22.348,30.077) 22.371,30.077 22.371,30.539 cw(c22.394,30.539) 22.394,30.562 22.577,30.562 cw(c22.577,30.539) 22.6,30.539 22.6,30.077 ccw(c22.623,30.077) 22.623,30.054 22.806,30.054 ccw(c22.806,30.077) 22.829,30.077 22.829,30.539 cw(c22.851,30.539) 22.851,30.562 23.034,30.562 cw(c23.034,30.539) 23.057,30.539 23.057,30.077 ccw(c23.08,30.077) 23.08,30.054 23.263,30.054 ccw(c23.263,30.077) 23.286,30.077 23.286,30.285 cw(c23.309,30.285) 23.309,30.308 v1@25.271,30.308 ; v1@10.312,29.845 cw(c10.676,29.845) 10.419,30.102 ; U3.D6@21.075,25.55 24.95,25.55 v1(25.275,25.875) ; U3.D6@21.198,25.427 cw(c21.496,25.129) 21.496,25.55 cw(c21.496,25.971) U3.D6@21.198,25.673 ; 24.77,30.308 cw(c24.77,29.745) v1@25.168,30.143 ; 25.015,30.308 cw(c25.015,29.99) v1@25.24,30.215 ; 25.052,30.308 ccw(c25.052,30.473) v1@25.168,30.357 ; v1@25.124,25.875 cw(c24.76,25.875) 25.018,25.618 cw(c25.275,25.36) v1@25.275,25.724 ; v1@34.662,25.654 cw(c34.521,25.118) U1.C8@35.001,25.395 ; v1@34.688,25.753 cw(c34.608,25.449) 34.88,25.606 ; v1@34.7,25.649 cw(c34.7,25.285) 34.957,25.543 cw(c35.215,25.8) v1@34.851,25.8 ; v1(34.7,25.8) U1.C8@35.2,25.3 ; v1@34.747,25.812 ccw(c35.051,25.892) 34.894,25.62 ; v1@34.75,25.658 cw(c34.785,25.558) 34.877,25.611 ; v1@34.842,25.75 ccw(c34.942,25.715) 34.889,25.623 ; v1@34.846,25.838 ccw(c35.382,25.979) U1.C8@35.105,25.499 ; U1.C8@35.001,25.3 ccw(c34.52,25.3) 34.86,25.64 ccw(c35.2,25.98) U1.C8@35.2,25.499 ; v1@34.739,25.654 cw(c34.781,25.496) 34.863,25.638 ccw(c34.781,25.496) v1@34.739,25.654 ; v1@34.846,25.761 ccw(c35.004,25.719) 34.862,25.637 cw(c35.004,25.719) v1@34.846,25.761
  Bottom Layer w0.102: v1@10.118,27.207 ccw(c9.861,27.464) 10.225,27.464 ccw(c10.589,27.464) v1@10.332,27.207 ; v1@10.118,29.768 cw(c9.861,29.511) 10.225,29.511 cw(c10.589,29.511) v1@10.332,29.768 ; v1(10.225,27.1) v1(10.225,29.875) v1@10.225,30 ; v1@25.168,25.982 ccw(c24.921,26.229) 25.271,26.229 ; v1@25.168,30.143 cw(c24.921,29.896) 25.271,29.896 ; v1@25.271,25.875 25.271,30.246 v1(25.275,30.25) ; 25.271,26.248 ccw(c25.648,26.248) v1@25.382,25.982 ; 25.271,29.876 cw(c25.649,29.876) v1@25.382,30.143 ; 25.273,29.489 26.378,29.489 26.378,29.791 cw(c26.389,29.791) 26.389,29.803 26.595,29.803 cw(c26.595,29.791) 26.607,29.791 26.607,29.12 ccw(c26.618,29.12) 26.618,29.108 26.824,29.108 ccw(c26.824,29.12) 26.835,29.12 26.835,29.791 cw(c26.847,29.791) 26.847,29.803 27.052,29.803 cw(c27.052,29.791) 27.064,29.791 27.064,29.12 ccw(c27.075,29.12) 27.075,29.108 27.281,29.108 ccw(c27.281,29.12) 27.292,29.12 27.292,29.791 cw(c27.304,29.791) 27.304,29.803 27.509,29.803 cw(c27.509,29.791) 27.521,29.791 27.521,29.12 ccw(c27.532,29.12) 27.532,29.108 27.738,29.108 ccw(c27.738,29.12) 27.749,29.12 27.749,29.796 cw(c27.761,29.796) 27.761,29.807 27.967,29.807 cw(c27.967,29.796) 27.978,29.796 27.978,29.12 ccw(c27.99,29.12) 27.99,29.108 28.195,29.108 ccw(c28.195,29.12) 28.207,29.12 28.207,29.796 cw(c28.218,29.796) 28.218,29.807 28.424,29.807 cw(c28.424,29.796) 28.435,29.796 28.435,29.12 ccw(c28.447,29.12) 28.447,29.108 28.652,29.108 ccw(c28.652,29.12) 28.664,29.12 28.664,29.796 cw(c28.675,29.796) 28.675,29.807 28.881,29.807 cw(c28.881,29.796) 28.892,29.796 28.892,29.12 ccw(c28.904,29.12) 28.904,29.108 29.11,29.108 ccw(c29.11,29.12) 29.121,29.12 29.121,29.796 cw(c29.133,29.796) 29.133,29.807 29.338,29.807 cw(c29.338,29.796) 29.35,29.796 29.35,29.12 ccw(c29.361,29.12) 29.361,29.108 29.567,29.108 ccw(c29.567,29.12) 29.578,29.12 29.578,29.796 cw(c29.59,29.796) 29.59,29.807 29.795,29.807 cw(c29.795,29.796) 29.807,29.796 29.807,29.12 ccw(c29.818,29.12) 29.818,29.108 30.024,29.108 ccw(c30.024,29.12) 30.035,29.12 30.035,29.796 cw(c30.047,29.796) 30.047,29.807 30.253,29.807 cw(c30.253,29.796) 30.264,29.796 30.264,29.12 ccw(c30.276,29.12) 30.276,29.108 30.481,29.108 ccw(c30.481,29.12) 30.493,29.12 30.493,29.796 cw(c30.504,29.796) 30.504,29.807 30.71,29.807 cw(c30.71,29.796) 30.721,29.796 30.721,29.489 31.572,29.489 31.877,29.185 31.877,26.264 32.029,26.111 34.389,26.111 v1(34.7,25.8) ; v1@34.549,25.8 ccw(c34.185,25.8) 34.443,26.057 ccw(c34.7,26.315) v1@34.7,25.951
AD10: U1.D8 U3.D5 U4.C2 | length 74.5
  Top Layer w0.102: v1@9.85,26.024 cw(c9.85,25.66) 10.107,25.918 cw(c10.365,26.175) v1@10.001,26.175 ; v1(9.85,26.175) U4.C2@10.225,25.8 ; v1@10.063,30.679 cw(c10.335,30.408) 10.335,30.792 ; v1@10.1,30.792 20.198,30.792 ccw(c20.198,30.815) 20.221,30.815 20.221,31.023 cw(c20.244,31.023) 20.244,31.046 20.427,31.046 cw(c20.427,31.023) 20.45,31.023 20.45,30.561 ccw(c20.473,30.561) 20.473,30.538 20.656,30.538 ccw(c20.656,30.561) 20.679,30.561 20.679,31.023 cw(c20.701,31.023) 20.701,31.046 20.884,31.046 cw(c20.884,31.023) 20.907,31.023 20.907,30.561 ccw(c20.93,30.561) 20.93,30.538 21.113,30.538 ccw(c21.113,30.561) 21.136,30.561 21.136,30.769 cw(c21.159,30.769) 21.159,30.792 v1(24.575,30.792) v1(27.965,30.792) ; U4.C2@10.131,25.8 ccw(c9.903,25.8) 10.064,25.961 ccw(c10.225,26.122) U4.C2@10.225,25.894 ; v1@10.135,30.607 cw(c10.58,30.162) 10.58,30.792 ; v1@10.207,30.535 cw(c10.825,29.917) 10.825,30.792 ; U3.D5@20.275,25.55 20.675,25.95 v1(24.35,25.95) ; U3.D5@20.275,25.724 ccw(c20.275,26.145) 20.572,25.847 ccw(c20.87,25.55) U3.D5@20.449,25.55 ; v1@24.243,25.843 ccw(c23.986,25.586) 23.986,25.95 ccw(c23.986,26.314) v1@24.243,26.057 ; v1@24.468,30.685 ccw(c24.211,30.428) 24.211,30.792 ccw(c24.211,31.156) v1@24.468,30.898 ; v1@24.682,30.685 cw(c24.939,30.428) 24.939,30.792 cw(c24.939,31.156) v1@24.682,30.898 ; 27.601,30.792 ccw(c27.601,31.156) v1@27.859,30.898 ; 27.602,30.792 cw(c27.602,30.428) v1@27.859,30.685 ; v1@35.662,25.654 cw(c35.521,25.118) U1.D8@36.001,25.395 ; v1@35.688,25.753 cw(c35.608,25.449) 35.88,25.606 ; v1@35.7,25.649 cw(c35.7,25.285) 35.957,25.543 cw(c36.215,25.8) v1@35.851,25.8 ; v1(35.7,25.8) U1.D8@36.2,25.3 ; v1@35.747,25.812 ccw(c36.051,25.892) 35.894,25.62 ; v1@35.75,25.658 cw(c35.785,25.558) 35.877,25.611 ; v1@35.842,25.75 ccw(c35.942,25.715) 35.889,25.623 ; v1@35.846,25.838 ccw(c36.382,25.979) U1.D8@36.105,25.499 ; U1.D8@36.001,25.3 ccw(c35.52,25.3) 35.86,25.64 ccw(c36.2,25.98) U1.D8@36.2,25.499 ; v1@35.739,25.654 cw(c35.781,25.496) 35.863,25.638 ccw(c35.781,25.496) v1@35.739,25.654 ; v1@35.846,25.761 ccw(c36.004,25.719) 35.862,25.637 cw(c36.004,25.719) v1@35.846,25.761
  Bottom Layer w0.102: v1@9.743,26.282 ccw(c9.527,26.498) 9.833,26.498 ; 9.833,26.58 ccw(c10.255,26.58) v1@9.957,26.282 ; v1(9.85,26.175) 9.833,26.192 9.833,30.375 v1(10.1,30.642) ; v1@9.949,30.642 cw(c9.585,30.642) 9.843,30.385 cw(c10.1,30.127) v1@10.1,30.491 ; v1(24.35,25.95) 24.575,26.175 ; v1@24.365,26.1 ccw(c24.391,26.359) 24.575,26.175 ; v1@24.468,30.685 cw(c24.211,30.428) 24.575,30.428 cw(c24.939,30.428) v1@24.682,30.685 ; v1@24.5,25.965 cw(c24.759,25.991) 24.575,26.175 ; v1(24.575,30.792) 24.575,26.175 ; v1(27.965,30.792) 28.41,30.792 28.41,31.161 cw(c28.421,31.161) 28.421,31.173 28.627,31.173 cw(c28.627,31.161) 28.639,31.161 28.639,30.422 ccw(c28.65,30.422) 28.65,30.411 28.856,30.411 ccw(c28.856,30.422) 28.867,30.422 28.867,31.161 cw(c28.879,31.161) 28.879,31.173 29.084,31.173 cw(c29.084,31.161) 29.096,31.161 29.096,30.422 ccw(c29.107,30.422) 29.107,30.411 29.313,30.411 ccw(c29.313,30.422) 29.324,30.422 29.324,31.161 cw(c29.336,31.161) 29.336,31.173 29.541,31.173 cw(c29.541,31.161) 29.553,31.161 29.553,30.422 ccw(c29.564,30.422) 29.564,30.411 29.77,30.411 ccw(c29.77,30.422) 29.781,30.422 29.781,31.161 cw(c29.793,31.161) 29.793,31.173 29.999,31.173 cw(c29.999,31.161) 30.01,31.161 30.01,30.422 ccw(c30.022,30.422) 30.022,30.411 30.227,30.411 ccw(c30.227,30.422) 30.239,30.422 30.239,31.161 cw(c30.25,31.161) 30.25,31.173 30.456,31.173 cw(c30.456,31.161) 30.467,31.161 30.467,30.422 ccw(c30.479,30.422) 30.479,30.411 30.684,30.411 ccw(c30.684,30.422) 30.696,30.422 30.696,31.161 cw(c30.707,31.161) 30.707,31.173 30.913,31.173 cw(c30.913,31.161) 30.924,31.161 30.924,30.422 ccw(c30.936,30.422) 30.936,30.411 31.142,30.411 ccw(c31.142,30.422) 31.153,30.422 31.153,31.161 cw(c31.165,31.161) 31.165,31.173 31.37,31.173 cw(c31.37,31.161) 31.382,31.161 31.382,30.422 ccw(c31.393,30.422) 31.393,30.411 31.599,30.411 ccw(c31.599,30.422) 31.61,30.422 31.61,31.161 cw(c31.622,31.161) 31.622,31.173 31.827,31.173 cw(c31.827,31.161) 31.839,31.161 31.839,30.422 ccw(c31.85,30.422) 31.85,30.411 32.056,30.411 ccw(c32.056,30.422) 32.067,30.422 32.067,31.161 cw(c32.079,31.161) 32.079,31.173 32.285,31.173 cw(c32.285,31.161) 32.296,31.161 32.296,30.422 ccw(c32.308,30.422) 32.308,30.411 32.513,30.411 ccw(c32.513,30.422) 32.525,30.422 32.525,31.161 cw(c32.536,31.161) 32.536,31.173 32.742,31.173 cw(c32.742,31.161) 32.753,31.161 32.753,30.422 ccw(c32.765,30.422) 32.765,30.411 32.97,30.411 ccw(c32.97,30.422) 32.982,30.422 32.982,31.161 cw(c32.993,31.161) 32.993,31.173 33.199,31.173 cw(c33.199,31.161) 33.21,31.161 33.21,30.792 34.029,30.792 34.087,30.734 34.087,27.413 v1(35.7,25.8) ; v1@28.072,30.685 cw(c28.329,30.428) 28.329,30.792 cw(c28.329,31.156) v1@28.072,30.898 ; v1@35.549,25.8 ccw(c35.185,25.8) 35.443,26.057 ccw(c35.7,26.315) v1@35.7,25.951
AD11: U1.A9 U3.C6 U4.D2 | length 69.6
  Top Layer w0.102: v1@9.1,26.024 cw(c9.1,25.66) 9.357,25.918 cw(c9.615,26.175) v1@9.251,26.175 ; v1(9.1,26.175) U4.D2@9.475,25.8 ; v1(9.1,30.675) 9.7,31.275 18.057,31.275 18.057,31.506 cw(c18.08,31.506) 18.08,31.529 18.263,31.529 cw(c18.263,31.506) 18.286,31.506 18.286,31.044 ccw(c18.308,31.044) 18.308,31.021 18.491,31.021 ccw(c18.491,31.044) 18.514,31.044 18.514,31.506 cw(c18.537,31.506) 18.537,31.529 18.72,31.529 cw(c18.72,31.506) 18.743,31.506 18.743,31.044 ccw(c18.766,31.044) 18.766,31.021 18.948,31.021 ccw(c18.948,31.044) 18.971,31.044 18.971,31.506 cw(c18.994,31.506) 18.994,31.529 19.177,31.529 cw(c19.177,31.506) 19.2,31.506 19.2,31.044 ccw(c19.223,31.044) 19.223,31.021 19.406,31.021 ccw(c19.406,31.044) 19.429,31.044 19.429,31.506 cw(c19.451,31.506) 19.451,31.529 19.634,31.529 cw(c19.634,31.506) 19.657,31.506 19.657,31.044 ccw(c19.68,31.044) 19.68,31.021 19.863,31.021 ccw(c19.863,31.044) 19.886,31.044 19.886,31.252 cw(c19.909,31.252) 19.909,31.275 v1(23.875,31.275) ; v1@9.1,30.826 ccw(c9.1,31.19) 9.357,30.932 ccw(c9.615,30.675) v1@9.251,30.675 ; U4.D2@9.381,25.8 ccw(c9.153,25.8) 9.314,25.961 ccw(c9.475,26.122) U4.D2@9.475,25.894 ; U3.C6@21.075,26.35 21.1,26.375 v1(23.625,26.375) ; U3.C6@21.126,26.299 cw(c21.311,26.114) 21.311,26.375 ; U3.C6@21.198,26.227 cw(c21.556,25.869) 21.556,26.375 ; U3.C6@21.198,26.473 ccw(c21.435,26.71) 21.435,26.375 ; v1@23.518,26.268 ccw(c23.261,26.011) 23.261,26.375 ccw(c23.261,26.739) v1@23.518,26.482 ; v1@23.768,31.168 ccw(c23.511,30.911) 23.511,31.275 ccw(c23.511,31.639) v1@23.768,31.382 ; v1@32.348,26.43 ccw(c32.661,26.743) 32.661,26.3 ; v1(32.385,26.467) 32.552,26.3 ; v1@32.42,26.502 ccw(c32.906,26.988) 32.906,26.3 ; v1@32.437,26.325 cw(c32.475,26.223) 32.552,26.3 ; v1@32.492,26.573 ccw(c33.152,27.233) U1.A9@33.152,26.3 ; v1@32.526,26.415 ccw(c32.629,26.377) 32.552,26.3 ; U1.A9@33.059,26.159 ccw(c32.719,25.819) 32.719,26.3 ccw(c32.719,26.781) U1.A9@33.059,26.441 ; U1.A9@33.2,26.3 32.552,26.3
  Bottom Layer w0.102: v1@8.993,26.282 ccw(c8.736,26.539) 9.1,26.539 ccw(c9.464,26.539) v1@9.207,26.282 ; v1@8.993,30.568 cw(c8.736,30.311) 9.1,30.311 cw(c9.464,30.311) v1@9.207,30.568 ; v1(9.1,26.175) v1(9.1,30.675) ; v1(23.625,26.375) 23.875,26.625 ; v1@23.628,26.526 ccw(c23.635,26.865) 23.875,26.625 ; v1@23.768,31.168 cw(c23.511,30.911) 23.875,30.911 cw(c24.239,30.911) 23.982,31.168 cw(c24.239,30.911) 24.239,31.275 cw(c24.239,31.639) v1@23.982,31.382 ; v1@23.776,26.378 cw(c24.115,26.385) 23.875,26.625 ; v1@32.278,26.573 ccw(c32.021,26.831) 32.385,26.831 ccw(c32.749,26.831) v1@32.492,26.573 ; v1(32.385,26.467) 32.385,27.013 32.715,27.343 33.35,27.343 33.35,27.572 32.08,27.572 32.08,27.8 33.346,27.8 33.346,28.029 32.08,28.029 32.08,28.258 33.35,28.258 33.35,28.486 32.08,28.486 32.08,28.715 33.35,28.715 33.35,28.943 32.08,28.943 32.08,29.172 33.35,29.172 33.35,29.4 32.08,29.4 32.08,29.629 33.35,29.629 33.35,29.858 32.715,29.858 32.715,29.972 32.677,30.011 26.276,30.011 26.225,30.061 26.225,31.204 26.154,31.275 v1(23.875,31.275) 23.875,26.625
AD12: U1.A12 U3.C5 U4.E2 | length 68.8
  Top Layer w0.102: v1@8.243,27.443 cw(c7.986,27.186) 8.35,27.186 cw(c8.714,27.186) v1@8.457,27.443 ; v1@8.35,27.475 8.35,26.175 U4.E2@8.725,25.8 ; v1(8.5,31.758) 16.495,31.758 cw(c16.495,31.735) 16.518,31.735 16.518,31.527 ccw(c16.541,31.527) 16.541,31.504 16.723,31.504 ccw(c16.723,31.527) 16.746,31.527 16.746,31.989 cw(c16.769,31.989) 16.769,32.012 16.952,32.012 cw(c16.952,31.989) 16.975,31.989 16.975,31.527 ccw(c16.998,31.527) 16.998,31.504 17.181,31.504 ccw(c17.181,31.527) 17.204,31.527 17.204,31.989 cw(c17.226,31.989) 17.226,32.012 17.409,32.012 cw(c17.409,31.989) 17.432,31.989 17.432,31.527 ccw(c17.455,31.527) 17.455,31.504 17.638,31.504 ccw(c17.638,31.527) 17.661,31.527 17.661,31.735 cw(c17.684,31.735) 17.684,31.758 v1(23.175,31.758) 26.607,31.758 26.607,32.027 cw(c26.618,32.027) 26.618,32.039 26.824,32.039 cw(c26.824,32.027) 26.835,32.027 26.835,31.389 ccw(c26.847,31.389) 26.847,31.377 27.052,31.377 ccw(c27.052,31.389) 27.064,31.389 27.064,32.027 cw(c27.075,32.027) 27.075,32.039 27.281,32.039 cw(c27.281,32.027) 27.292,32.027 27.292,31.389 ccw(c27.304,31.389) 27.304,31.377 27.509,31.377 ccw(c27.509,31.389) 27.521,31.389 27.521,32.027 cw(c27.532,32.027) 27.532,32.039 27.738,32.039 cw(c27.738,32.027) 27.749,32.027 27.749,31.389 ccw(c27.761,31.389) 27.761,31.377 27.967,31.377 ccw(c27.967,31.389) 27.978,31.389 27.978,32.027 cw(c27.99,32.027) 27.99,32.039 28.195,32.039 cw(c28.195,32.027) 28.207,32.027 28.207,31.389 ccw(c28.218,31.389) 28.218,31.377 28.424,31.377 ccw(c28.424,31.389) 28.435,31.389 28.435,32.027 cw(c28.447,32.027) 28.447,32.039 28.652,32.039 cw(c28.652,32.027) 28.664,32.027 28.664,31.389 ccw(c28.675,31.389) 28.675,31.377 28.881,31.377 ccw(c28.881,31.389) 28.892,31.389 28.892,32.027 cw(c28.904,32.027) 28.904,32.039 29.11,32.039 cw(c29.11,32.027) 29.121,32.027 29.121,31.389 ccw(c29.133,31.389) 29.133,31.377 29.338,31.377 ccw(c29.338,31.389) 29.35,31.389 29.35,32.027 cw(c29.361,32.027) 29.361,32.039 29.567,32.039 cw(c29.567,32.027) 29.578,32.027 29.578,31.389 ccw(c29.59,31.389) 29.59,31.377 29.795,31.377 ccw(c29.795,31.389) 29.807,31.389 29.807,32.027 cw(c29.818,32.027) 29.818,32.039 30.024,32.039 cw(c30.024,32.027) 30.035,32.027 30.035,31.389 ccw(c30.047,31.389) 30.047,31.377 30.253,31.377 ccw(c30.253,31.389) 30.264,31.389 30.264,32.027 cw(c30.276,32.027) 30.276,32.039 30.481,32.039 cw(c30.481,32.027) 30.493,32.027 30.493,31.389 ccw(c30.504,31.389) 30.504,31.377 30.71,31.377 ccw(c30.71,31.389) 30.721,31.389 30.721,32.027 cw(c30.733,32.027) 30.733,32.039 30.938,32.039 cw(c30.938,32.027) 30.95,32.027 30.95,31.389 ccw(c30.961,31.389) 30.961,31.377 31.167,31.377 ccw(c31.167,31.389) 31.178,31.389 31.178,32.027 cw(c31.19,32.027) 31.19,32.039 31.396,32.039 cw(c31.396,32.027) 31.407,32.027 31.407,31.389 ccw(c31.419,31.389) 31.419,31.377 31.624,31.377 ccw(c31.624,31.389) 31.636,31.389 31.636,32.027 cw(c31.647,32.027) 31.647,32.039 31.853,32.039 cw(c31.853,32.027) 31.864,32.027 31.864,31.389 ccw(c31.876,31.389) 31.876,31.377 32.081,31.377 ccw(c32.081,31.389) 32.093,31.389 32.093,32.027 cw(c32.104,32.027) 32.104,32.039 32.31,32.039 cw(c32.31,32.027) 32.322,32.027 32.322,31.389 ccw(c32.333,31.389) 32.333,31.377 32.539,31.377 ccw(c32.539,31.389) 32.55,31.389 32.55,32.027 cw(c32.562,32.027) 32.562,32.039 32.767,32.039 cw(c32.767,32.027) 32.779,32.027 32.779,31.389 ccw(c32.79,31.389) 32.79,31.377 32.996,31.377 ccw(c32.996,31.389) 33.007,31.389 33.007,31.758 33.164,31.758 33.2,31.722 U1.A12@33.2,29.3 ; v1@8.607,31.652 cw(c8.864,31.394) 8.864,31.758 cw(c8.864,32.122) v1@8.607,31.865 ; U4.E2@8.631,25.8 ccw(c8.403,25.8) 8.564,25.961 ccw(c8.725,26.122) U4.E2@8.725,25.894 ; U3.C5@20.275,26.35 20.675,26.75 v1(22.975,26.75) ; U3.C5@20.275,26.524 ccw(c20.275,26.945) 20.572,26.647 ccw(c20.87,26.35) U3.C5@20.449,26.35 ; v1@22.868,26.643 ccw(c22.611,26.386) 22.611,26.75 ccw(c22.611,27.114) v1@22.868,26.857 ; v1@23.068,31.652 ccw(c22.811,31.394) 22.811,31.758 ccw(c22.811,32.122) v1@23.068,31.865 ; v1@23.282,31.652 cw(c23.539,31.394) 23.539,31.758 ; U1.A12@33.059,29.441 ccw(c32.719,29.781) 33.2,29.781 ccw(c33.681,29.781) U1.A12@33.341,29.441
  Bottom Layer w0.102: v1@8.243,27.657 ccw(c7.986,27.914) 8.35,27.914 ccw(c8.714,27.914) v1@8.457,27.657 ; v1(8.35,27.55) 8.35,31.608 v1(8.5,31.758) ; 8.35,31.032 cw(c9.226,31.032) v1@8.607,31.652 ; 8.35,31.277 cw(c8.981,31.277) v1@8.535,31.724 ; 8.35,31.523 cw(c8.736,31.523) v1@8.463,31.795 ; v1(22.975,26.75) 23.175,26.95 v1(23.175,31.758) ; v1@23.068,31.652 cw(c22.811,31.394) 23.175,31.394 cw(c23.539,31.394) v1@23.282,31.652